# Altium PCB PCB1.PcbDoc (part 1 of 4)
Units mm, origin at the board's own origin, x right, y up, seen from the top; angles counter-clockwise.
Board outline 152.65 x 113.28 mm, 2 copper layers (Top Layer, Bottom Layer); 145 components, 136 nets, 617 pads, 371 vias.
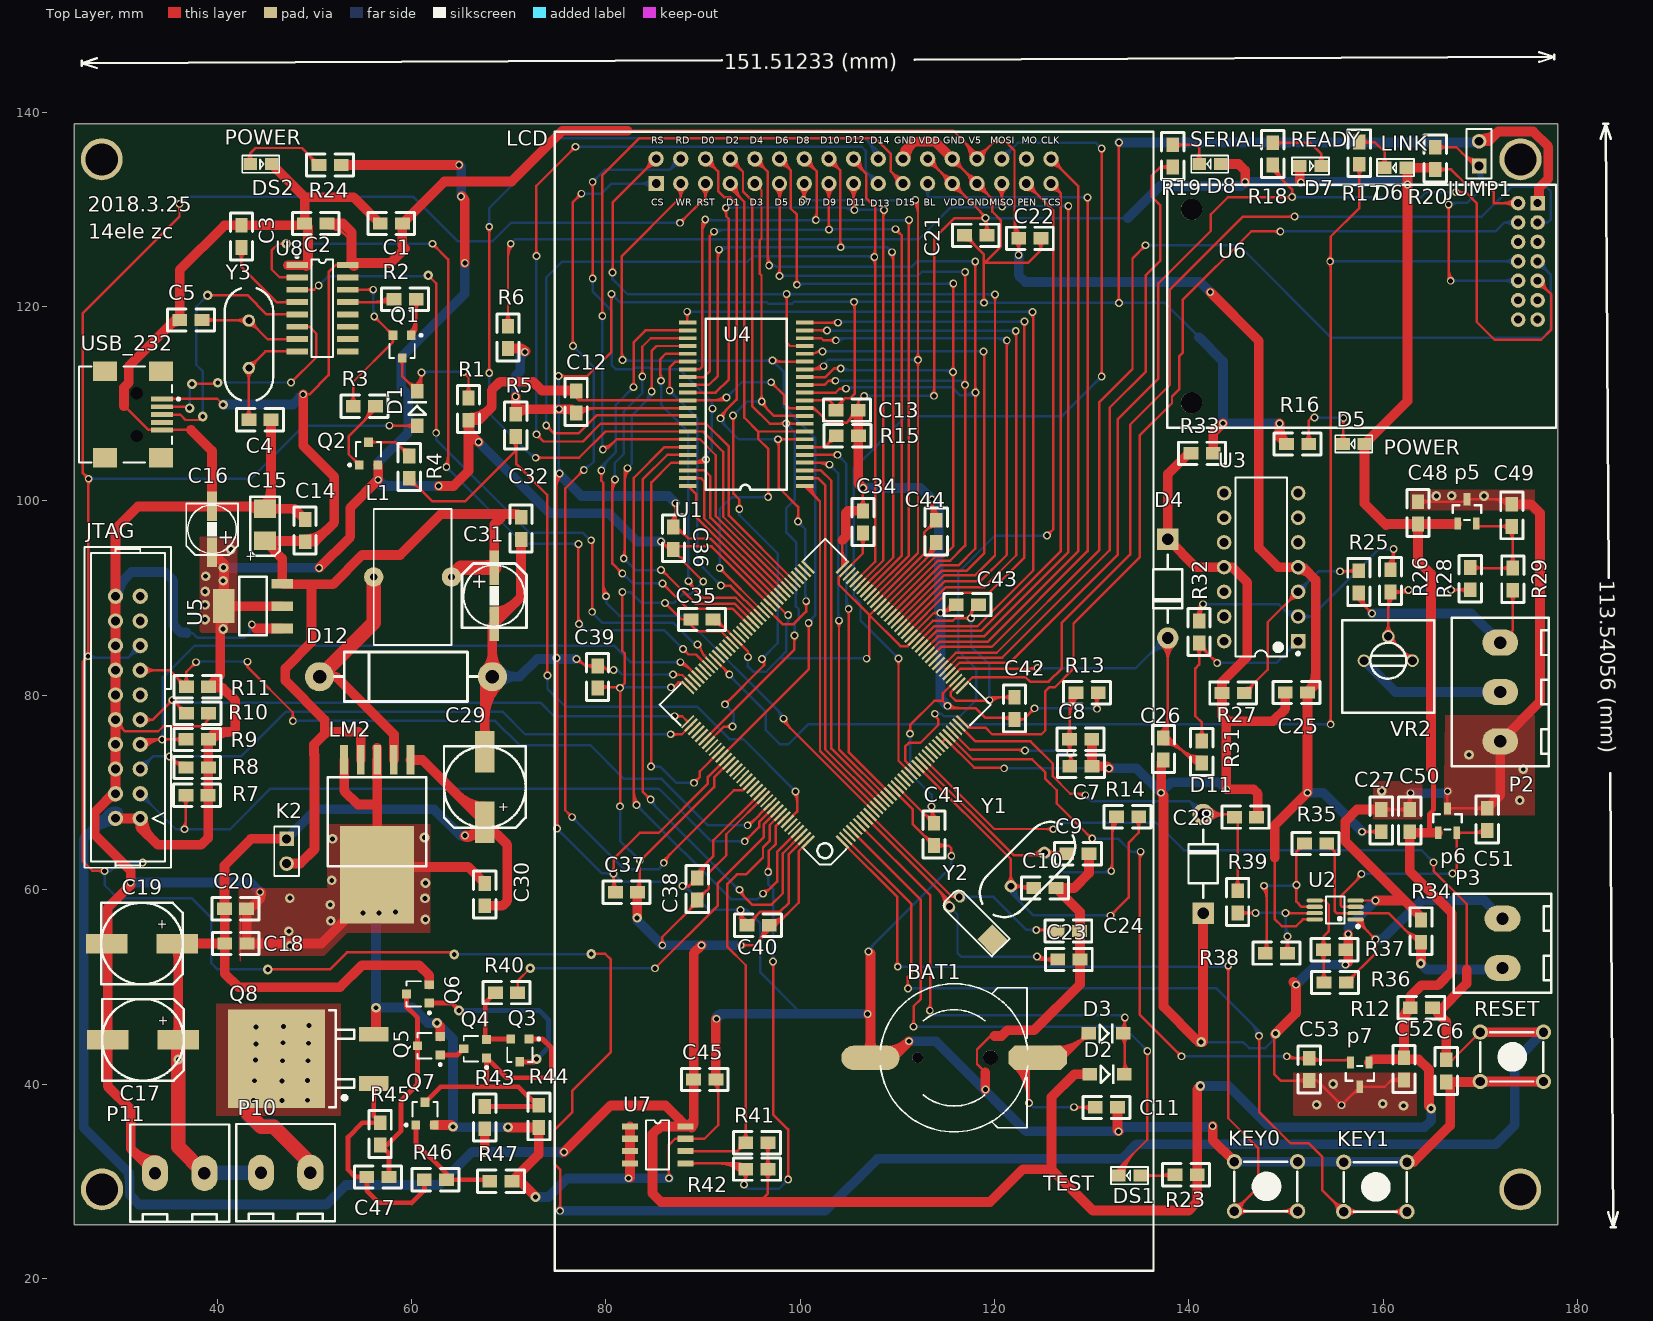
[diagram p0: Top Layer view]
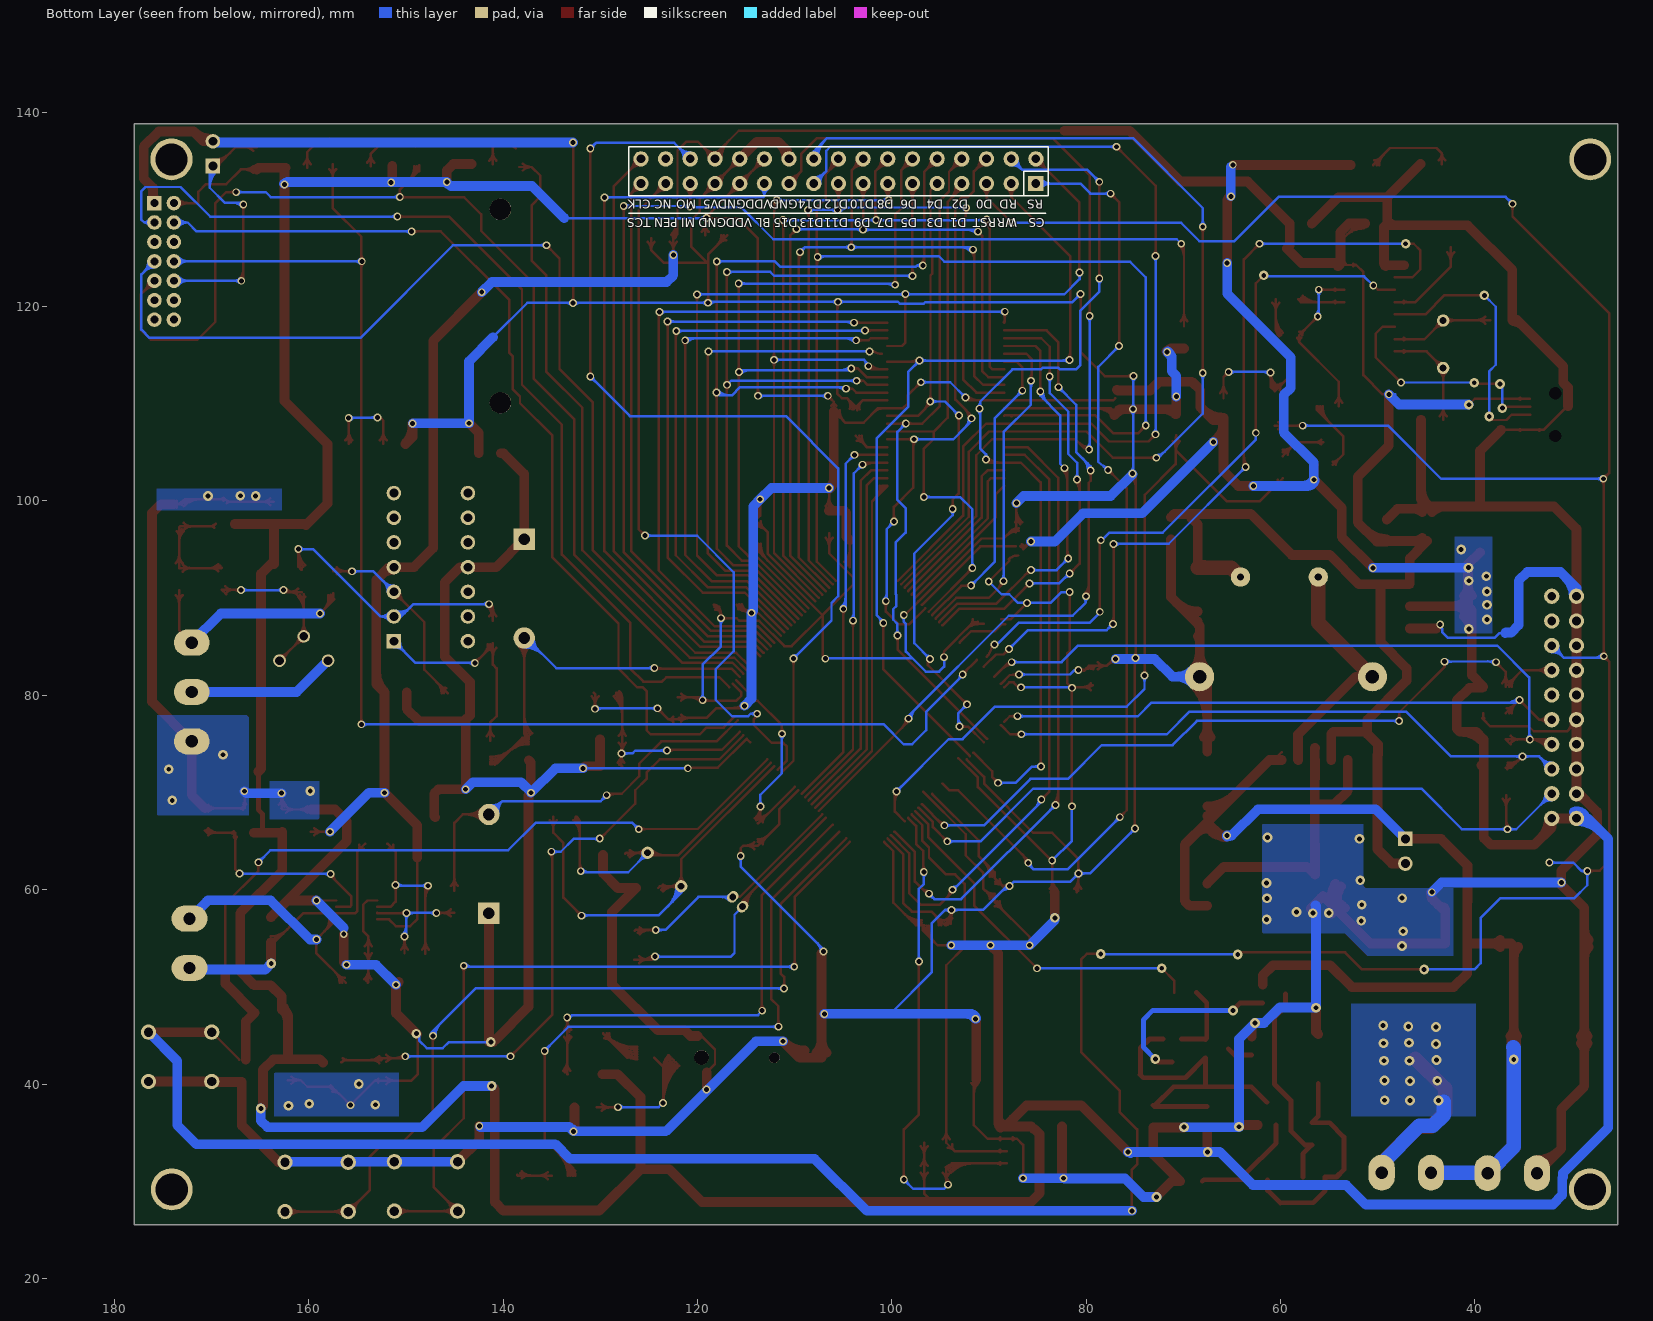
[diagram p1: Bottom Layer view, seen from below]

## Layer stack, top to bottom
Top Layer: signal copper 0.0356
Dielectric: dielectric 0.32, FR-4, Dk 4.8
Bottom Layer: signal copper 0.0356

## Board outline
25.273,138.811 177.927,138.811 177.927,25.527 25.273,25.527

## Design rules (kind name [scope] priority, off if disabled: settings)
Clearance [All] p1: gap=0.14
ComponentClearance [All] p1 off: gap=0.254 collisioncheckmode=3 verticalgap=0.254 showdistances=FALSE
HoleSize [All] p1: absolutevalues=TRUE maxlimit=2.54 minlimit=0.5 maxpercent=80.000 minpercent=20.000
HoleToHoleClearance [All] p1: gap=0.14 allowstackedmicrovias=TRUE
MinimumSolderMaskSliver [All] p1: minsoldermaskwidth=0.14
PlaneConnect [All] p1: planeconnectstyle=Direct reliefexpansion=0.508 reliefentries=4 reliefconductorwidth=0.254 reliefairgap=0.254
PolygonConnect [All] p1: connectstyle=Direct reliefconductorwidth=0.254 reliefentries=4 polygonreliefangle="90 Angle"
RoutingVias [All] p1: holewidth=0.711 width=1.27 viastyle="Through Hole" minholewidth=0.5 minwidth=1 maxholewidth=0.711 maxwidth=1.27
SilkToSilkClearance [All] p1: silktosilkclearance=0
SilkscreenOverComponentPads [All] p1: minsilkscreentomaskgap=0
SolderMaskExpansion [All] p1: expansion=0.102
Width [All] p1: maxlimit=1.5 minlimit=0.254 preferedwidth=0.254
21 further rules are at their usual default settings.

## Components (designator, comment, footprint, x,y, rotation, side; value= is the part's Value field where it differs from the comment)
BAT1 "BATT" BATM 115.824,42.697 r90 top
C1 "104" 0805 56.769,128.549 r0 top
C2 "10uf" 0805 48.997,128.549 r0 top
C3 "104" 0805 42.494,126.086 r90 top
C4 "22" 0805 45.542,108.356 r180 top
C5 "22" 0805 36.144,118.618 r0 top
C6 "104" 0805 166.472,42.494 r270 top
C7 "10uf" 0805 130.023,72.695 r180 top
C8 "104" 0805 127.711,75.489 r0 top
C9 "22" 0805 129.718,63.703 r180 top
C10 "22" 0805 126.314,60.173 r180 top
C11 "104" 0805 132.639,37.592 r180 top
C12 "104" 0805 76.937,109.042 r90 top
C13 "104" 0805 103.683,109.347 r0 top
C14 "104" 0805 49.047,98.095 r270 top
C15 "10uF" CASE-3216A 44.907,97.409 r90 top
C16 "22uF" "RVT 22UF 25V" 39.472,97.13 r180 top
C17 "100uF" CC8*10.5 32.36,44.552 r270 top
C18 "104" 0805 43.053,54.456 r180 top
C19 "100uF" CC8*10.5 32.258,54.458 r270 top
C20 "104" 0805 43.028,58.037 r180 top
C21 "104" 0805 119.202,127.33 r180 top
C22 "104" 0805 122.479,127.025 r0 top
C23 "104" 0805 128.778,52.807 r180 top
C24 "104" 0805 128.727,55.753 r180 top
C25 "104" 0805 152.197,80.289 r180 top
C26 "104" 0805 137.363,73.33 r90 top
C27 "104" 0805 159.791,65.964 r90 top
C28 "104" 0805 146.964,67.462 r180 top
C29 "100uF" CC8*10.5 67.539,70.561 r180 top
C30 "104" 0805 67.539,58.344 r90 top
C31 "100uF" "rvt 100uf /25V" 68.504,90.195 r270 top
C32 "104" 0805 71.272,98.323 r270 top
C34 "104" 0805 106.451,96.698 r90 top
C35 "104" 0805 91.034,87.808 r180 top
C36 "104" 0805 86.944,97.307 r270 top
C37 "104" 0805 80.975,59.741 r0 top
C38 "104" 0805 89.408,61.214 r270 top
C39 "104" 0805 79.146,83.033 r270 top
C40 "104" 0805 94.513,56.337 r0 top
C41 "104" 0805 113.767,64.541 r90 top
C42 "104" 0805 122.047,79.807 r270 top
C43 "104" 0805 118.339,89.332 r180 top
C44 "104" 0805 113.995,95.733 r90 top
C45 "Cap" 0805 91.313,40.462 r180 top
C47 "104" 0805 57.683,30.429 r180 top
C48 "104" 0805 163.576,99.924 r270 top
C49 "104" 0805 173.228,99.67 r270 top
C50 "104" 0805 162.712,68.25 r270 top
C51 "104" 0805 170.688,68.377 r270 top
C52 "104" 0805 162.128,40.411 r90 top
C53 "104" 0805 152.375,40.361 r90 top
D1 "1N4148" DIODE_SOP 60.579,107.747 r90 top
D2 "1N4148" DIODE_SOP 129.794,40.996 r0 top
D3 "1N4148" DIODE_SOP 129.692,45.212 r0 top
D4 "1N4733" LC-DO-41 137.82,90.983 r90 top
D5 "POWER" SMDLED 158.064,105.867 r180 top
D6 "LINK" SMDLED 162.357,134.29 r180 top
D7 "READY" SMDLED 151.409,134.468 r0 top
D8 "SERIAL" SMDLED 143.256,134.671 r180 top
D11 "1N4733" LC-DO-41 141.453,62.662 r270 top
D12 "1N5822" 1n5822 59.538,81.94 r0 top
DS1 "LED1" SMDLED 134.976,30.582 r180 top
DS2 "LED1" SMDLED 43.383,134.671 r0 top
JTAG "JTAG" JTAG_20 30.81,78.765 r90 top
JUMP1 "Jumper" HDR1X2 169.85,134.468 r90 top
K2 "Header 2" HDR1X2 47.142,65.227 r270 top
KEY0 "KEY_M" KEY_M 144.678,32.004 r0 top
KEY1 "KEY_M" KEY_M 155.931,31.953 r0 top
L1 "33uH" 100UH 56.109,92.177 r0 top
LCD "TFT4.3" DB2*17-3.5 78.181,137.998 r0 top locked
LM2 "LM2596S-5.0" LM2596S-5.0 55.474,68.453 r270 top
P2 "PT100 TL" 3SPI 172.034,75.26 r90 top
P3 "PT100" 2SPI 176.327,19.812 r90 top
p5 "ref2930" LC-SOT-23(SOT-23-3) 168.605,98.933 r270 top
p6 "ref2930" LC-SOT-23(SOT-23-3) 166.599,67.107 r270 top
p7 "ref2930" LC-SOT-23(SOT-23-3) 157.582,40.97 r90 top
P10 "Header 2" 2SPI 12.37,26.822 r0 top
P11 "Header 2" 2SPI 1.473,26.772 r0 top
Q1 "S8050" SOT-23R 59.03,116.002 r180 top
Q2 "S8550" SOT-23R 55.575,104.75 r0 top
Q3 "2N5551" SOT-23R 71.145,43.586 r180 top
Q4 "2N5401" SOT-23R 66.675,43.637 r90 top
Q5 "2N5551" SOT-23R 61.9,43.942 r90 top
Q6 "2N5401" SOT-23R 60.782,49.276 r90 top
Q7 "2N5551" SOT-23R 61.392,36.83 r0 top
Q8 "NMOS-2" LC-TO-263-2 56.109,42.596 r0 top
R1 "10K" 0805 65.862,110.592 r270 top
R2 "1K" 0805 60.477,120.752 r180 top
R3 "1K" 0805 56.286,109.753 r180 top
R4 "1K" 0805 59.766,102.337 r90 top
R5 "10K" 0805 70.714,106.629 r90 top
R6 "10K" 0805 69.926,117.983 r270 top
R7 "10K" 0805 39.065,69.723 r180 top
R8 "10K" 0805 39.091,72.568 r180 top
R9 "10K" 0805 39.091,75.463 r180 top
R10 "10K" 0805 39.116,78.156 r180 top
R11 "10K" 0805 39.116,80.874 r180 top
R12 "10K" 0805 165.049,47.854 r180 top
R13 "10R" 0805 128.372,80.264 r0 top
R14 "1M" 0805 132.537,67.513 r0 top
R15 "10K" 0805 103.708,106.705 r0 top
R16 "2K" 0805 152.324,105.867 r180 top
R17 "1K" 0805 157.531,136.931 r270 top
R18 "1K" 0805 148.615,136.855 r270 top
R19 "1K" 0805 138.328,136.652 r270 top
R20 "10K" 0805 165.354,136.398 r270 top
R23 "510" 0805 138.557,30.658 r0 top
R24 "510" 0805 50.47,134.569 r0 top
R25 "1K" 0805 157.48,90.526 r90 top
R26 "1K" 0805 160.731,90.627 r90 top
R27 "20K" 0805 143.408,80.239 r0 top
R28 "2K" 0805 168.935,90.856 r90 top
R29 "2K" 0805 173.33,90.805 r90 top
R31 "Res2" 0805 141.326,75.311 r270 top
R32 "20K" 0805 141.046,87.655 r270 top
R33 "0Ω" 0805 140.208,104.902 r0 top
R34 "3.3K" 0805 163.881,54.585 r90 top
R35 "47K" 0805 154.178,64.745 r180 top
R36 "47K" 0805 153.899,50.444 r0 top
R37 "470K" 0805 156.134,53.823 r180 top
R38 "470K" 0805 150.139,53.467 r180 top
R39 "1K" 0805 145.009,59.893 r270 top
R40 "1K" 0805 70.917,49.403 r180 top
R41 "4.7K" 0805 94.386,33.96 r0 top
R42 "4.7K" 0805 94.386,31.242 r0 top
R43 "10K" 0805 67.539,37.694 r270 top
R44 "10K" 0805 73.101,35.535 r90 top
R45 "10" 0805 56.769,36.017 r270 top
R46 "10K" 0805 63.602,30.15 r180 top
R47 "10K" 0805 70.333,29.997 r180 top
RESET "KEY_M" KEY_M 169.977,45.339 r0 top
U1 "STM32F103ZET6" LQFP144 104.324,64.916 r135 top
U2 "LM358" LC-MSOP-8 155.042,57.912 r90 top
U3 "LM324" LC-DIP-14 147.422,93.193 r180 top
U4 "IS62WV51216" TSOP44 100.432,101.549 r180 top
U5 "AMS1117M3" LC-SOT-223 43.688,89.179 r0 top
U6 "WIFI" USR-WIFI232 156.693,115.418 r90 top
U7 "24C02" SOP-8 82.474,35.636 r0 top
U8 "CH340G" SOP16M 50.825,119.837 r270 top
USB_232 "USB" USB/SM0.8-6H5 26.467,108.89 r180 top
VR2 "502" 503 160.503,83.566 r0 top
Y1 "8MHz" XTAL_US 121.666,60.35 r45 top
Y2 "32.768MHz" XTAL32 116.357,59.258 r315 top
Y3 "12MHz" XTAL_US 43.256,118.567 r270 top

## Footprints (in the part's own frame and the unit in brackets; to place one, negate y for a bottom-side part, rotate by r counter-clockwise, add the part's x,y. Pads: shape width x height; smd on the part's side, far side on the other; paste and mask are expansions set on the pad)
1n5822 [mm]
  round 3 hole 1.4: A(8.775,-0.025) K(-9.005,-0.025)
  silkscreen extent -7.48,-2.57 7.25,2.52
2SPI [mil]
  oval 106x145 hole 50: 1(1265,160) 2(1465,160)
  silkscreen extent 1165,-37 1565,357
3SPI [mil]
  oval 106x145 hole 50: 1(0,0) 2(200,0) 3(400,0)
  silkscreen extent -100,-197 500,197
100UH [mm]
  round 2 hole 0.7: 1(8,0)
  round 2 hole 0.762: 2(0,0)
  silkscreen extent 0,-7 8,7
503 [mm]
  round 1.3 hole 0.9: 1(-2.5,0) 2(2.5,0) 3(0,2.5)
  silkscreen extent -4.75,-5.35 4.75,4.15, body extent -4.62,-5.21 4.62,4.04, height 11.05
0805 [mil]
  rect 60x50 smd: 1(0,-0.06) 2(90,-0.06)
  silkscreen extent -50,-45 140,45
BATM [mm]
  round 1.1 hole 1.1 unplated: 0(0,3.748)
  round 1.5 hole 1.5 unplated: 0(0.025,-3.752)
  oct 2.5x6 smd: 1(0,-8.602)
  oval 2.5x6 smd: 2(0,8.598)
  silkscreen extent -7.62,-7.58 7.62,7.57
CASE-3216A [mil]
  rect 75x90 smd: A(-60,0) K(70,0)
  silkscreen extent -120,-60 120,60
CC8*10.5 [mm]
  rect 2x4.3 smd: A(0,3.627) K(0,-3.627)
  silkscreen extent -4.2,-4.2 4.2,4.2, body extent -4.22,-4.11 4.15,4.27, height 10.5
DB2*17-3.5 [mil]
  rect 62x62 hole 35: 1(275,-210)
  round 62 hole 35: 2(275,-110) 3(375,-210) 4(375,-110) 5(475,-210) 6(475,-110) 7(575,-210) 8(575,-110) 9(675,-210) 10(675,-110) 11(775,-210) 12(775,-110) 13(875,-210) 14(875,-110) 15(975,-210) 16(975,-110) 17(1075,-210) 18(1075,-110) 19(1175,-210) 20(1175,-110) 21(1275,-210) 22(1275,-110) 23(1375,-210) 24(1375,-110) 25(1475,-210) 26(1475,-110) 27(1575,-210) 28(1575,-110) 29(1675,-210) 30(1675,-110) 31(1775,-210) 32(1775,-110) 33(1875,-210) 34(1875,-110)
  silkscreen extent -135,-4615 2290,0
DIODE_SOP [mm]
  rect 1.5x1.3 smd: 1(0,0) 2(3.556,0)
  silkscreen extent 1.14,-1.02 2.56,1.02
HDR1X2 [mm]
  rect 1.5x1.5 hole 0.9: 1(0,0)
  round 1.5 hole 0.9: 2(2.54,0)
  silkscreen extent -1.27,-1.27 3.81,1.27
JTAG_20 [mil]
  round 62 hole 35: 1(-450,-50) 2(-450,50) 3(-350,-50) 4(-350,50) 5(-250,-50) 6(-250,50) 7(-150,-50) 8(-150,50) 9(-50,-50) 10(-50,50) 11(50,-50) 12(50,50) 13(150,-50) 14(150,50) 15(250,-50) 16(250,50) 17(350,-50) 18(350,50) 19(450,-50) 20(450,50)
  silkscreen extent -650,-175 650,175
KEY_M [mil]
  round 62 hole 38: 1(0,0) 1(255.91,0) 2(0,-200) 2(255.91,-200)
  silkscreen extent 0,-200 255,0
LC-DIP-14 [mm]
  rect 1.5x1.5 hole 0.9: 1(-3.81,7.62)
  round 1.5 hole 0.9: 2(-3.81,5.08) 3(-3.81,2.54) 4(-3.81,0) 5(-3.81,-2.54) 6(-3.81,-5.08) 7(-3.81,-7.62) 8(3.81,-7.62) 9(3.81,-5.08) 10(3.81,-2.54) 11(3.81,0) 12(3.81,2.54) 13(3.81,5.08) 14(3.81,7.62)
  silkscreen extent -3.95,-9.2 2.65,9.2
LC-DO-41 [mm]
  rect 2.2x2.2 hole 1.2: A(5.08,0)
  round 2.2 hole 1.2: K(-5.08,0)
  silkscreen extent -3.5,-1.5 3.5,1.5, body extent -5.51,-1.35 5.51,1.35, height 3.35
LC-MSOP-8 [mm]
  oval 0.43x1.7 smd mask+0.051: 1(-0.975,-2.1) 2(-0.325,-2.1) 3(0.325,-2.1) 4(0.975,-2.1) 5(0.975,2.1) 6(0.325,2.1) 7(-0.325,2.1) 8(-0.975,2.1)
  silkscreen extent -1.85,-2.5 1.38,0.95
LC-SOT-23(SOT-23-3) [mm]
  rect 1.25x0.7 smd: 1(1.25,-0.95) 2(1.25,0.95) 3(-1.25,0)
  silkscreen extent -0.65,-1.46 0.9,1.46, body extent -1.5,-1.5 1.5,1.5, height 1.3
LC-SOT-223 [mm]
  rect 2.2x1 smd: 1(3,-2.3) 2(3,0) 3(3,2.3)
  rect 2.2x3.5 smd: 2(-3,0)
  silkscreen extent -1.4,-3 1.4,3, body extent -3.49,-3.24 3.49,3.24, height 1.64
LC-TO-263-2 [mm]
  rect 3x1.5 smd: 1(0,-2.54) 3(0,2.54)
  rect 10x10.1 smd: 2(-10,0)
  silkscreen extent -4.6,-5 -2,5
LM2596S-5.0 [mil]
  rect 120x32 smd: 1(-192.91,173.23) 2(-192.91,106.23) 3(-192.91,39.23) 4(-192.91,-27.77) 5(-192.91,-94.77)
  rect 393.7x300 smd: 3(272.09,38.23)
  silkscreen extent -123,-162 237,238
LQFP144 [mm]
  rect 1.8x0.254 smd: 1(-0.009,0.001) 2(-0.009,-0.499) 3(-0.009,-0.999) 4(-0.009,-1.499) 5(-0.009,-1.999) 6(-0.009,-2.499) 7(-0.009,-2.999) 8(-0.009,-3.499) 9(-0.009,-3.999) 10(-0.009,-4.499) 11(-0.009,-4.999) 12(-0.009,-5.499) 13(-0.009,-5.999) 14(-0.009,-6.499) 15(-0.009,-6.999) 16(-0.009,-7.499) 17(-0.009,-7.999) 18(-0.009,-8.499) 19(-0.009,-8.999) 20(-0.009,-9.499) 21(-0.009,-9.999) 22(-0.009,-10.499) 23(-0.009,-10.999) 24(-0.009,-11.499) 25(-0.009,-11.999) 26(-0.009,-12.499) 27(-0.009,-12.999) 28(-0.009,-13.499) 29(-0.009,-13.999) 30(-0.009,-14.499) 31(-0.009,-14.999) 32(-0.009,-15.499) 33(-0.009,-15.999) 34(-0.009,-16.499) 35(-0.009,-16.999) 36(-0.009,-17.499) 73(22.491,-17.499) 74(22.491,-16.999) 75(22.491,-16.499) 76(22.491,-15.999) 77(22.491,-15.499) 78(22.491,-14.999) 79(22.491,-14.499) 80(22.491,-13.999) 81(22.491,-13.499) 82(22.491,-12.999) 83(22.491,-12.499) 84(22.491,-11.999) 85(22.491,-11.499) 86(22.491,-10.999) 87(22.491,-10.499) 88(22.491,-9.999) 89(22.491,-9.499) 90(22.491,-8.999) 91(22.491,-8.499) 92(22.491,-7.999) 93(22.491,-7.499) 94(22.491,-6.999) 95(22.491,-6.499) 96(22.491,-5.999) 97(22.491,-5.499) 98(22.491,-4.999) 99(22.491,-4.499) 100(22.491,-3.999) 101(22.491,-3.499) 102(22.491,-2.999) 103(22.491,-2.499) 104(22.491,-1.999) 105(22.491,-1.499) 106(22.491,-0.999) 107(22.491,-0.499) 108(22.491,0.001)
  rect 0.254x1.8 smd: 37(2.491,-19.999) 38(2.991,-19.999) 39(3.491,-19.999) 40(3.991,-19.999) 41(4.491,-19.999) 42(4.991,-19.999) 43(5.491,-19.999) 44(5.991,-19.999) 45(6.491,-19.999) 46(6.991,-19.999) 47(7.491,-19.999) 48(7.991,-19.999) 49(8.491,-19.999) 50(8.991,-19.999) 51(9.491,-19.999) 52(9.991,-19.999) 53(10.491,-19.999) 54(10.991,-19.999) 55(11.491,-19.999) 56(11.991,-19.999) 57(12.491,-19.999) 58(12.991,-19.999) 59(13.491,-19.999) 60(13.991,-19.999) 61(14.491,-19.999) 62(14.991,-19.999) 63(15.491,-19.999) 64(15.991,-19.999) 65(16.491,-19.999) 66(16.991,-19.999) 67(17.491,-19.999) 68(17.991,-19.999) 69(18.491,-19.999) 70(18.991,-19.999) 71(19.491,-19.999) 72(19.991,-19.999) 109(19.991,2.501) 110(19.491,2.501) 111(18.991,2.501) 112(18.491,2.501) 113(17.991,2.501) 114(17.491,2.501) 115(16.991,2.501) 116(16.491,2.501) 117(15.991,2.501) 118(15.491,2.501) 119(14.991,2.501) 120(14.491,2.501) 121(13.991,2.501) 122(13.491,2.501) 123(12.991,2.501) 124(12.491,2.501) 125(11.991,2.501) 126(11.491,2.501) 127(10.991,2.501) 128(10.491,2.501) 129(9.991,2.501) 130(9.491,2.501) 131(8.991,2.501) 132(8.491,2.501) 133(7.991,2.501) 134(7.491,2.501) 135(6.991,2.501) 136(6.491,2.501) 137(5.991,2.501) 138(5.491,2.501) 139(4.991,2.501) 140(4.491,2.501) 141(3.991,2.501) 142(3.491,2.501) 143(2.991,2.501) 144(2.491,2.501)
  silkscreen extent -0.81,-20.8 23.29,3.3
"RVT 22UF 25V" [mil]
  rect 40x120 smd: A(0,95) K(0,-91)
  silkscreen extent -104,-103 105,106, body extent -104,-110 105,110, height 205
"rvt 100uf /25V" [mil]
  rect 140x40 smd: A(-116,0) K(112,0)
  silkscreen extent -132,-130 128,130, body extent -143,-130 133,130, height 205
SMDLED [mm]
  rect 1.4x1.27 smd: A(0.001,-0.002) K(2.211,-0.002)
  silkscreen extent -0.8,-0.89 3.01,0.89
SOP16M [mm]
  rect 0.6x2.2 smd: 1(-4.445,-2.6) 2(-3.175,-2.6) 3(-1.905,-2.6) 4(-0.635,-2.6) 5(0.635,-2.6) 6(1.905,-2.6) 7(3.175,-2.6) 8(4.445,-2.6) 9(4.445,2.6) 10(3.175,2.6) 11(1.905,2.6) 12(0.635,2.6) 13(-0.635,2.6) 14(-1.905,2.6) 15(-3.175,2.6) 16(-4.445,2.6)
  silkscreen extent -5.42,-2.72 5,1.1
SOP-8 [mil]
  rect 65x25 smd: 1(0,0) 2(0,-50) 3(0,-100) 4(0,-150) 5(224.41,-150) 6(224.41,-100) 7(224.41,-50) 8(224.41,0)
  silkscreen extent 65,-175 159,25
SOT-23R [mm]
  rect 0.9x0.95 smd: 1(0.95,-1.048) 2(-0.95,-1.048) 3(0,1.302)
  silkscreen extent -2.07,-1.17 1.3,1.3
TSOP44 [mm]
  rect 1.8x0.4 smd: 1(-0.009,0.001) 2(-0.009,-0.799) 3(-0.009,-1.599) 4(-0.009,-2.399) 5(-0.009,-3.199) 6(-0.009,-3.999) 7(-0.009,-4.799) 8(-0.009,-5.599) 9(-0.009,-6.399) 10(-0.009,-7.199) 11(-0.009,-7.999) 12(-0.009,-8.799) 13(-0.009,-9.599) 14(-0.009,-10.399) 15(-0.009,-11.199) 16(-0.009,-11.999) 17(-0.009,-12.799) 18(-0.009,-13.599) 19(-0.009,-14.399) 20(-0.009,-15.199) 21(-0.009,-15.999) 22(-0.009,-16.799) 23(11.991,-16.799) 24(11.991,-15.999) 25(11.991,-15.199) 26(11.991,-14.399) 27(11.991,-13.599) 28(11.991,-12.799) 29(11.991,-11.999) 30(11.991,-11.199) 31(11.991,-10.399) 32(11.991,-9.599) 33(11.991,-8.799) 34(11.991,-7.999) 35(11.991,-7.199) 36(11.991,-6.399) 37(11.991,-5.599) 38(11.991,-4.799) 39(11.991,-3.999) 40(11.991,-3.199) 41(11.991,-2.399) 42(11.991,-1.599) 43(11.991,-0.799) 44(11.991,0.001)
  silkscreen extent 1.83,-17.2 10.16,0.4
USB/SM0.8-6H5 [mm]
  rect 2.3x0.5 smd: 1(-7.85,-1.6) 2(-7.85,-0.8) 3(-7.85,0) 4(-7.85,0.8) 5(-7.85,1.6)
  rect 2.5x2 smd: 6(-7.75,4.45) 7(-1.996,4.45) 8(-7.75,-4.45) 9(-1.996,-4.45)
  round 0.6 hole 1.27 unplated: MH1(-5.25,2.2) MH2(-5.25,-2.2)
  silkscreen extent -9.68,-4.95 0.7,4.95
USR-WIFI232 [mm]
  round 2.21 hole 2.21: 0(-5.31,16.423) 0(14.59,16.423)
  rect 1.5x1.5 hole 0.813: 1(15.24,-19.177)
  round 1.5 hole 0.813: 2(15.24,-17.177) 3(13.24,-19.177) 4(13.24,-17.177) 5(11.24,-19.177) 6(11.24,-17.177) 7(9.24,-19.177) 8(9.24,-17.177) 9(7.24,-19.177) 10(7.24,-17.177) 11(5.24,-19.177) 12(5.24,-17.177) 13(3.24,-19.177) 14(3.24,-17.177)
  silkscreen extent -7.86,-21.08 17.14,18.92
XTAL32 [mil]
  oval 50x40 hole 28: 1(0,0) 2(0,-56)
  rect 92.13x86 smd: ""(220,-27)
  silkscreen extent -28,-77 264,25
XTAL_US [mil]
  round 50 hole 28: 1(0,0) 2(192.13,0)
  silkscreen extent -131,-98 323,98

## Part data
BAT1: library part BAT
C1 C2 C3 C4 C5 C6 C7 C8 C9 C10 C11 C12 C13 C21 C22 C23 C24 C25 C26 C27 C28 C34 C35 C36 C37 C38 C39 C40 C41 C42 C43 C44 C47 C48 C49 C50 C51 C52 C53: library part C
C14 C18 C20: library part Cap1
C15 C16: library part Cap2
C17 C19 C29 C31: library part Cap3
C30 C32: library part CAP
C45: "Capacitor"
D1 D2 D3: library part D
D4 D11: library part "Diode 18TQ045", "Schottky Rectifier"
D5 D6 D7 D8: library part LED1
D12: library part ZENER3, "Zener Diode"
DS1 DS2: library part LED2, "Typical RED, GREEN, YELLOW, AMBER GaAs LED"
K2 P10 P11: "Header, 2-Pin"
L1: library part L
LCD: library part TFT_LCD2
LM2: library part 12V-5V
P2: library part "Header 3", "Header, 3-Pin"
P3: library part "Header 2", "Header, 2-Pin"
Q1 Q3 Q5 Q7: library part NPN, "8050/BCW846/BCW847"
Q2 Q4 Q6: library part PNP, "8550/BCW68"
Q8: "N-Channel Power MOSFET"
R1 R2 R3 R4 R5 R6 R7 R8 R9 R10 R11 R12 R13 R14 R15 R23 R24 R25 R26 R27 R28 R29 R32 R33 R34 R35 R36 R37 R38 R39 R40 R41 R42 R43 R44 R45 R46 R47: library part R
R16 R17 R18 R19 R20: library part Res1
R31: "Resistor"
U4: library part IS61LV51216
U5: library part AMS1117-3.3
U6: library part USR-WIFI232-ABD
U7: library part 24C256
U8: "USB2UART"
USB_232: library part USB5
VR2: library part RPot, "Potentiometer"
Y1 Y2 Y3: library part XTAL, "Crystal Oscillator"

## Free pads (board coordinates)
  round 4.318 hole 3.302: 0(28.143,29.159) 1(28.118,135.159) 2(174.118,135.159) 3(174.092,29.159)

## Via types
v1: diameter 0.8, hole 0.508, Top Layer to Bottom Layer, 296 vias
v2: diameter 1, hole 0.5, Top Layer to Bottom Layer, 75 vias

## Nets (pads, with @x,y where several pads share a name; then routed paths per layer and width w, separated by ;. In a path a pad name is that pad's centre, name@x,y a point inside that pad or via, vN(x,y) a via of type N, cw(c..) or ccw(c..) an arc to the next point about the centre after c; other vN are vias at no path point)
24V: C17.A C18.2 C19.A C20.2 C29.A C30.1 K2.1 LM2.1 P10.1 P11.2 Q6.1 | length 153.7
  Top Layer w0.254: C17.A@35.885,44.653 C17.A@35.987,44.552 ; LM2.1@59.874,74.14 LM2.1@60.267,73.747
  Top Layer w1: C19.A@35.531,54.104 cw(c34.433,53.005) 35.987,53.005 ; C17.A@35.633,44.905 ccw(c34.78,45.759) 35.987,45.759 ccw(c37.194,45.759) C17.A@36.34,44.905 ; C17.A@35.987,44.552 35.987,54.173 36.271,54.458 C18.2@40.767,54.458 ; C19.A@37.389,54.104 cw(c38.242,53.25) 38.242,54.458 cw(c38.242,55.665) C19.A@37.389,54.811 ; K2.1@47.142,65.227 43.485,65.227 40.742,62.484 40.742,58.75 40.767,58.725 C18.2@40.767,54.458 ; LM2.1@59.874,73.353 61.12,73.353 C29.A@67.539,66.934 ; Q6.1@61.83,50.226 61.83,51.174 60.782,52.222 54.889,52.222 52.629,49.962 42.189,49.962 40.767,51.384 C18.2@40.767,54.458 ; 64.722,69.751 ccw(c67.539,72.568) C29.A@67.539,68.584 ; v1@65.454,65.498 ccw(c65.767,66.003) 66.187,65.583 ; v1@65.507,65.483 ccw(c65.507,66.885) 66.498,65.893 ; v1(65.507,65.583) 66.187,65.583 ; v1@65.845,65.583 ccw(c65.845,67.477) C29.A@67.185,66.138 ; 66.429,68.044 ccw(c67.539,69.153) C29.A@67.539,67.584 ; C29.A@67.13,66.072 cw(c66.187,66.735) 66.187,65.583 ; C29.A@67.539,66.284 cw(c67.539,64.715) 68.648,65.825 ; C30.1@67.54,58.344 69.342,58.344 69.85,58.852 69.85,64.623 C29.A@67.539,66.934 ; 66.187,65.583 C29.A@67.539,66.934
  Top Layer w1.5: C17.A@35.987,44.552 35.987,33.533 P11.2@38.684,30.836 ; P10.1@44.45,30.836 P10.1@44.501,30.886
  Bottom Layer w1: K2.1@47.142,65.227 50.19,68.275 62.332,68.275 65.024,65.583 v1(65.507,65.583) ; 64.853,65.753 ccw(c65.507,66.406) v1@65.507,65.483
  Bottom Layer w1.5: 36.043,43.79 35.992,43.739 35.992,33.528 P11.2@38.684,30.836 38.735,30.886 P10.1@44.501,30.886
  other v2: 35.992,42.52
AGND: C7.1 C8.2 C25.2 C26.1 C27.2 C28.1 C48.1 C49.1 C50.1 C51.1 C52.1 C53.1 D4.A D11.A P2.1 p5.3 p6.3 p7.3 R27.1 R33.1 R34.2 R37.1 U1.30 U1.31 U2.4 U3.11 | length 304.8
  Top Layer w0.254: U1.30@114.577,75.169 114.93,75.522 117.91,72.542 v1@120.98,72.542 ; C8.2@129.638,75.128 cw(c128.709,74.199) 130.023,74.199 ; C8.2@129.818,75.308 cw(c129.323,74.813) 130.023,74.813 ; 130.023,74.322 cw(c131.162,74.322) C8.2@130.356,75.128 ; v2@148.838,45.13 148.615,44.907 148.768,44.755 148.768,41.021 149.428,40.361 C53.1@152.376,40.361 153.162,40.361 ; C53.1@152.017,40.001 ccw(c151.15,39.134) 151.15,40.361 ccw(c151.15,41.587) C53.1@152.017,40.72 ; C53.1@152.839,40.152 cw(c153.162,40.007) 153.162,40.361 ; C53.1@152.839,40.569 ccw(c153.162,40.714) 153.162,40.361 ; v1@155.429,37.821 ccw(c154.77,37.821) 155.236,38.287 ccw(c155.702,38.753) 155.702,38.094 ccw(c155.702,38.704) 156.134,38.272 ; v1(155.702,37.821) v1@155.692,37.831 ; v1@155.975,37.821 cw(c156.682,37.821) 156.182,38.321 ; 156.731,38.87 cw(c157.582,38.02) p7.3@157.582,39.222 ; U2.4@157.142,58.887 v1(159.207,58.887) ; 157.165,39.304 cw(c157.582,38.887) p7.3@157.582,39.476 ; p7.3@157.739,39.563 cw(c158.12,39.182) 158.12,39.72 cw(c158.12,40.259) p7.3@157.739,39.878 ; C27.2@159.434,67.891 ccw(c158.567,67.023) 158.567,68.25 ccw(c158.567,69.476) C27.2@159.434,68.609 ; C27.2@159.793,68.25 C50.1@162.711,68.25 C50.1@162.789,68.328 ; C27.2@160.152,67.891 cw(c161.019,67.023) 161.019,68.25 cw(c161.019,69.476) C27.2@160.152,68.609 ; C52.1@161.771,40.052 ccw(c160.903,39.185) 160.903,40.411 ccw(c160.903,41.638) C52.1@161.771,40.771 ; C52.1@162.13,40.411 160.833,40.411 160.142,39.72 p7.3@157.582,39.72 v1@155.692,37.831 ; C50.1@162.352,67.891 ccw(c161.484,67.023) 161.484,68.25 ccw(c161.484,69.476) C50.1@162.352,68.609 ; C50.1@162.352,68.736 ccw(c161.296,69.791) v1@162.789,69.791 ; C50.1@162.531,68.556 ccw(c161.91,69.178) 162.789,69.178 ; v1@162.596,69.733 cw(c162.13,69.267) 162.789,69.267 cw(c163.448,69.267) v1@162.982,69.733 ; 162.789,69.415 ccw(c163.749,69.415) C50.1@163.07,68.736 ; v1(162.789,69.926) C50.1@162.789,68.328 ; C50.1@162.818,68.357 C50.1@162.789,68.328 ; C48.1@163.574,99.924 168.346,99.924 p5.3@168.605,100.183 172.713,100.183 C49.1@173.226,99.67 173.863,99.67 ; C48.1@163.934,99.564 cw(c164.801,98.697) 164.801,99.924 cw(c164.801,101.15) C48.1@163.934,100.283 ; p6.3@166.441,68.789 ccw(c166.06,69.17) 166.599,69.17 ccw(c167.137,69.17) p6.3@166.756,68.789 ; v1@166.599,70.129 p6.3@166.599,68.357 166.619,68.377 C51.1@170.686,68.377 ; p6.3@166.756,68.199 cw(c167.185,67.77) 167.185,68.377 ; p6.3@166.756,68.514 ccw(c167.089,68.847) 167.089,68.377 ; 168.029,99.924 cw(c168.029,99.332) p5.3@168.448,99.75 ; 168.105,99.924 ccw(c168.105,100.409) p5.3@168.448,100.066 ; p5.3@168.763,100.025 cw(c169.144,99.645) 169.144,100.183 cw(c169.144,100.721) p5.3@168.763,100.341 ; C51.1@170.327,68.018 ccw(c169.46,67.15) 169.46,68.377 ccw(c169.46,69.603) C51.1@170.327,68.736 ; 171.067,100.183 cw(c171.067,97.637) C49.1@172.867,99.437 ; 171.68,100.183 cw(c171.68,98.251) C49.1@173.047,99.617 ; 172.294,100.183 cw(c172.294,98.864) C49.1@173.226,99.797 ; C49.1@173.586,99.31 cw(c174.453,98.443) 174.453,99.67 cw(c174.453,100.896) C49.1@173.586,100.029 ; 153.162,40.361 v1@155.692,37.831
  Top Layer w1: C8.2@129.997,75.487 130.023,75.462 C7.1@130.023,72.696 131.57,72.696 v1(131.775,72.492) ; v1(137.135,69.977) 137.135,73.1 C26.1@137.365,73.33 ; v1@137.389,69.723 137.389,47.955 140.792,44.552 ; R33.1@140.208,104.9 139.952,104.9 137.82,102.768 D4.A@137.82,96.063 140.691,93.193 U3.11@143.612,93.193 144.424,93.193 145.999,91.618 145.999,83.972 143.408,81.382 R27.1@143.408,80.237 143.408,77.927 143.84,77.495 v1(143.84,70.333) 146.634,70.333 147.091,69.875 147.091,67.591 C28.1@146.964,67.464 ; v2@140.906,44.552 140.792,44.552 ; D11.A@141.453,57.582 141.453,44.348 141.427,44.323 v2(141.249,44.323) 141.021,44.323 140.792,44.552 ; 143.993,77.343 148.641,77.343 149.911,78.613 C25.2@149.911,80.291 ; v2@148.838,45.13 151.003,47.295 v1(151.003,50.216) v1@150.722,50.497 ; v1@156.388,52.553 v1(156.388,55.423) ; v1(159.207,58.887) 161.866,58.887 ; C27.2@159.793,68.25 157.302,68.25 156.083,67.031 156.083,64.973 R34.2@163.882,57.174 ; C51.1@170.686,68.377 172.034,69.725 P2.1@172.034,75.26 176.124,79.35 176.124,98.755 175.209,99.67 173.863,99.67
  Bottom Layer w0.254: v1(120.98,72.492) v1(131.775,72.492) ; v2(141.249,44.323) 145.567,44.323 146.202,43.688 147.853,43.688 148.641,44.475 148.641,45.085 148.742,45.187 v2(148.92,45.187) ; v1(162.789,69.926) v1@162.992,70.129 ; v1@162.802,69.913 cw(c163.325,69.39) 163.325,70.129 ; v1@162.982,69.733 cw(c163.938,68.777) 163.938,70.129
  Bottom Layer w1: v1(131.775,72.492) 134.62,72.492 v1(137.135,69.977) ; v1@137.135,70.053 138.125,71.044 143.129,71.044 v1(143.84,70.333) ; v1(151.003,50.216) 153.06,52.273 v1(156.108,52.273) ; 156.388,56.068 v1(159.207,58.887) ; v1(162.789,69.926) 166.421,69.926 v1(166.624,70.129)
  other v2: 162.077,37.77 153.137,37.871 159.944,37.973 154.838,40.005 174.041,69.19 159.842,70.155 174.396,72.39 168.808,73.889 165.456,100.508 170.358,100.508 167.03,100.533
BOOT0: R4.1 R5.1 U1.138 | length 84.6
  Top Layer w0.254: R4.1@59.768,101.702 cw(c59.768,100.169) 60.852,101.253 ; R4.1@59.768,101.956 cw(c59.768,101.036) 60.418,101.686 ; R4.1@59.768,102.337 62.155,99.949 65.481,99.949 70.739,105.207 ; R4.1@60.276,102.21 ccw(c61.196,102.21) 60.545,101.559 ; R5.1@70.356,106.143 cw(c69.309,105.096) 70.79,105.096 ; R5.1@70.536,106.323 cw(c69.922,105.709) 70.79,105.709 ; R5.1@70.715,106.629 R5.1@70.739,106.605 ; R5.1@70.739,106.756 R5.1@70.739,106.605 ; 70.79,105.456 cw(c71.762,105.456) R5.1@71.074,106.143 ; v1@73.797,82.235 ccw(c73.454,82.578) 73.939,82.578 ; v1@73.939,82.042 73.939,100.635 70.79,103.784 70.79,106.555 R5.1@70.739,106.605 ; 73.939,82.824 ccw(c74.772,82.824) v1@74.183,82.235 ; U1.138@98.667,67.037 99.67,68.04 v1@99.67,69.952 ; v1@99.324,69.911 cw(c98.49,69.077) 99.67,69.077 ; v1@99.504,70.091 cw(c99.103,69.69) 99.67,69.69
  Bottom Layer w0.254: v1@73.797,81.849 cw(c73.331,81.383) 73.99,81.383 cw(c74.649,81.383) v1@74.183,81.849 ; v1(73.99,82.042) 73.99,80.67 75.819,78.842 89.357,78.842 92.71,75.489 94.132,75.489 v1(99.517,70.104) ; v1@99.244,70.104 ccw(c98.585,70.104) 99.051,70.57 ccw(c99.517,71.036) v1@99.517,70.377
BOOT1: LCD.29 R6.1 U1.48 | length 137.5
  Top Layer w0.254: R6.1@69.565,118.469 ccw(c68.698,119.336) 69.925,119.336 ccw(c71.151,119.336) R6.1@70.284,118.469 ; R6.1@69.925,117.983 69.925,126.186 v1(70.206,126.467) ; 69.925,125.129 cw(c71.543,125.129) v1@70.399,126.274 ; 69.925,125.742 cw(c70.93,125.742) v1@70.219,126.453 ; U1.48@112.809,84.715 114.156,86.062 118.904,86.062 127.584,94.742 v1(127.584,130.353) ; LCD.29@120.259,132.197 cw(c119.132,131.07) 120.726,131.07 cw(c122.321,131.07) LCD.29@121.193,132.197 ; LCD.29@120.439,132.377 cw(c119.745,131.683) 120.726,131.683 cw(c121.707,131.683) LCD.29@121.014,132.377 ; v1@120.584,130.495 ccw(c120.241,130.838) 120.726,130.838 ; v1@120.726,130.353 LCD.29@120.726,132.664 ; 120.726,131.084 ccw(c121.559,131.084) v1@120.97,130.495 ; v1@127.391,130.16 cw(c126.925,129.694) 127.584,129.694 cw(c128.243,129.694) v1@127.777,130.16
  Bottom Layer w0.254: v1(70.206,126.467) 70.669,126.93 112.198,126.93 115.5,130.232 v1@120.707,130.232 ; 119.949,130.232 ccw(c119.949,131.13) v1@120.584,130.495 ; 120.286,130.232 cw(c120.286,129.811) v1@120.584,130.109 ; v1@120.828,130.353 v1(127.584,130.353) ; v1@120.97,130.109 cw(c121.559,129.52) 121.559,130.353 ; v1@120.97,130.495 ccw(c121.313,130.838) 121.313,130.353 ; v1@127.391,130.16 ccw(c126.925,129.694) 126.925,130.353 ccw(c126.925,131.012) v1@127.391,130.546
  other v1: 120.777,130.302
"CH340 D+": U8.5 USB_232.3 | length 27.8
  Top Layer w0.254: USB_232.3@34.317,108.89 36.195,108.89 36.754,108.331 38.125,108.331 v2@38.405,108.61 ; v2(39.014,121.158) 39.04,121.183 43.104,121.183 45.085,119.202 U8.5@48.225,119.202 U8.5@48.2,119.228
  Bottom Layer w0.254: v2@38.456,108.636 v2(38.506,108.687) 38.506,113.36 37.846,114.021 37.846,119.99 v2(39.014,121.158)
"CH340 D-": U8.6 USB_232.2 | length 24
  Top Layer w0.254: USB_232.2@34.317,109.69 v2@37.16,109.69 ; v2(37.414,112.039) 39.929,112.039 v2(40.056,112.166) ; v1(47.6,112.192) 50.19,114.783 50.19,117.221 49.479,117.932 U8.6@48.225,117.932
  Bottom Layer w0.254: v2(37.16,109.55) 37.16,111.785 v2(37.414,112.039) ; v2@40.081,112.192 v1(47.6,112.192)
"FSMC A0": U1.10 U4.24 | length 82.4
  Top Layer w0.254: v1@79.334,102.931 cw(c78.868,102.465) 79.527,102.465 cw(c80.186,102.465) v1@79.72,102.931 ; v1(79.527,103.124) 79.527,102.083 79.731,101.879 79.731,90.551 80.086,90.195 v1(80.01,90.195) ; 79.731,90.916 ccw(c80.73,90.916) v1@80.023,90.209 ; 79.731,91.529 ccw(c81.344,91.529) v1@80.203,90.388 ; v1@82.636,111.902 ccw(c82.048,112.491) 82.88,112.491 ; v1(82.829,111.709) 82.829,111.862 82.88,111.912 82.88,116.357 84.071,117.549 U4.24@88.441,117.549 ; 82.88,112.246 ccw(c83.366,112.246) v1@83.022,111.902 ; v1@98.273,77.331 U1.10@107.506,68.098 ; v1@98.292,77.597 ccw(c98.98,77.597) 98.493,77.11 ; v1@98.546,77.597 ccw(c99.848,77.597) 98.927,76.676
  Bottom Layer w0.254: v1(79.527,103.124) 79.527,103.556 81.026,105.054 81.026,109.906 v1(82.829,111.709) ; v1@79.546,103.124 cw(c80.635,103.124) 79.865,103.894 ; v1@79.8,103.124 cw(c81.502,103.124) 80.299,104.327 ; v1@79.836,89.985 cw(c79.442,89.508) 80.061,89.508 ; 80.061,89.659 cw(c80.546,89.659) v1@80.203,90.002 ; v1@80.061,90.195 80.061,89.51 81.382,88.189 87.96,88.189 98.273,77.876 v1(98.273,77.597) ; v1@82.556,111.709 cw(c81.897,111.709) 82.363,111.243 cw(c82.829,110.777) v1@82.829,111.436 ; 97.609,78.54 cw(c96.666,77.597) v1@98,77.597 ; 98.043,78.106 cw(c97.533,77.597) v1@98.254,77.597
"FSMC A1": U1.11 U4.1 | length 39.6
  Top Layer w0.254: U4.1@100.453,101.591 ccw(c100.567,101.584) U4.1@100.486,101.503 ; U4.1@100.706,101.575 ccw(c101.318,101.538) 100.885,101.104 ; U4.1@100.96,101.56 ccw(c102.069,101.492) 101.283,100.706 ; U4.1@100.966,101.549 U4.1@100.441,101.549 102.032,99.957 102.032,74.279 U1.11@107.859,68.451 ; U4.1@101.213,101.544 ccw(c102.82,101.445) 101.682,100.307
"FSMC A2": U1.12 U4.2 | length 45.6
  Top Layer w0.254: U4.2@100.441,102.349 101.842,102.349 102.565,101.625 102.565,74.473 ; 102.565,74.452 108.213,68.805 102.565,74.452
"FSMC A3": U1.13 U4.3 | length 38.3
  Top Layer w0.254: U4.3@100.441,103.149 102.134,103.149 103.2,102.083 103.2,74.524 U1.13@108.566,69.158
"FSMC A4": U1.14 U4.4 | length 44.1
  Top Layer w0.254: U4.4@100.441,103.949 102.757,103.949 v1@103.099,103.607 ; 101.844,103.949 cw(c101.844,102.555) v1@102.829,103.541 ; 102.458,103.949 cw(c102.458,103.169) v1@103.009,103.72 ; v1@103.795,87.488 cw(c103.329,87.022) 103.988,87.022 cw(c104.647,87.022) v1@104.181,87.488 ; v1(103.988,87.681) 103.988,74.444 U1.14@108.92,69.512
  Bottom Layer w0.254: v1@103.022,103.461 cw(c103.022,102.802) 103.488,103.268 cw(c103.954,103.734) v1@103.295,103.734 ; v1(103.022,103.734) 103.911,102.845 v1@103.911,87.833 ; v1@103.795,87.874 ccw(c103.512,88.156) 103.911,88.156 ; 103.911,88.524 ccw(c104.831,88.524) v1@104.181,87.874
"FSMC A5": U1.15 U4.5 | length 45.7
  Top Layer w0.254: U4.5@100.441,104.749 v1(103.835,104.75) ; 103.174,104.749 ccw(c103.174,105.411) v1@103.642,104.943 ; 103.179,104.749 cw(c103.179,104.093) v1@103.642,104.557 ; v1@104.785,88.707 cw(c104.319,88.241) 104.978,88.241 cw(c105.637,88.241) v1@105.171,88.707 ; v1@104.8,89.078 v1(104.978,88.9) 104.978,74.161 U1.15@109.273,69.865
  Bottom Layer w0.254: v1@103.835,104.477 cw(c103.835,103.818) 104.301,104.284 cw(c104.767,104.75) v1@104.108,104.75 ; v1(103.835,104.75) 104.75,103.835 104.75,89.129 v1(104.978,88.9) ; 104.75,89.498 ccw(c105.576,89.498) v1@104.992,88.913 ; 104.75,90.111 ccw(c106.189,90.111) v1@105.171,89.093
"FSMC A6": U1.50 U4.23 | length 82.9
  Top Layer w0.254: v1@88.174,119.289 cw(c87.708,118.823) 88.367,118.823 cw(c89.026,118.823) v1@88.56,119.289 ; 88.367,118.704 ccw(c88.796,118.704) U4.23@88.492,118.4 ; v1(88.367,119.482) 88.367,118.423 U4.23@88.441,118.349 ; U1.50@112.102,85.422 113.777,87.097 118.212,87.097 123.977,92.862 v1@123.977,119.456 ; v1@123.708,119.263 cw(c123.058,118.613) 123.977,118.613 ; v1(123.901,119.456) v1@124.028,119.583 ; 123.977,118.981 cw(c124.376,118.981) v1@124.094,119.263
  Bottom Layer w0.254: v1@88.367,119.431 88.392,119.456 v1(123.901,119.456) ; v1@88.56,119.289 cw(c88.964,118.884) 88.964,119.456 ; v1@88.56,119.675 ccw(c89.087,120.202) 89.087,119.456 ; v1@123.708,119.263 ccw(c123.242,118.797) 123.242,119.456 ccw(c123.242,120.115) v1@123.708,119.649
"FSMC A7": U1.53 U4.22 | length 66.1
  Top Layer w0.254: U4.22@100.441,118.349 v1(103.871,118.349) ; v1@103.678,118.156 ccw(c103.212,117.69) 103.212,118.349 ccw(c103.212,119.008) v1@103.678,118.542 ; U1.53@111.041,86.482 115.11,90.551 119.431,90.551 123.063,94.183 v1(123.063,118.466) ; v1@122.87,118.273 cw(c122.404,117.807) 123.063,117.807 cw(c123.722,117.807) v1@123.256,118.273
  Bottom Layer w0.254: v1(103.871,118.349) 103.988,118.466 v1(123.063,118.466) ; v1@104.064,118.156 cw(c104.812,117.407) 104.812,118.466 ; v1@122.87,118.273 ccw(c122.404,117.807) 122.404,118.466 ccw(c122.404,119.125) v1@122.87,118.659
"FSMC A8": U1.54 U4.21 | length 63.8
  Top Layer w0.254: U4.21@100.441,117.549 v1(102.746,117.549) v1@102.845,117.45 ; v1@102.553,117.356 ccw(c102.087,116.89) 102.087,117.549 ccw(c102.087,118.208) v1@102.553,117.742 ; U1.54@110.688,86.836 114.987,91.135 118.948,91.135 122.225,94.412 122.225,117.45 v1(122.174,117.5) ; v1@121.981,117.307 cw(c121.392,116.719) 122.225,116.719 ; 122.225,116.964 cw(c122.71,116.964) v1@122.367,117.307
  Bottom Layer w0.254: v1@102.768,117.5 v1(122.174,117.5) ; v1@102.939,117.356 cw(c103.288,117.006) 103.288,117.5 ; v1@102.939,117.742 ccw(c103.521,118.324) 103.521,117.5 ; v1@121.981,117.307 ccw(c121.515,116.841) 121.515,117.5 ccw(c121.515,118.159) v1@121.981,117.693
"FSMC A9": U1.55 U4.20 | length 62.6
  Top Layer w0.254: U4.20@100.441,116.749 102.174,116.749 102.387,116.535 v1(103.657,116.535) ; v1@103.464,116.342 ccw(c102.998,115.876) 102.998,116.535 ccw(c102.998,117.194) v1@103.464,116.728 ; U1.55@110.334,87.189 114.889,91.745 118.542,91.745 121.26,94.463 v1(121.26,116.535) ; v1@121.067,116.342 cw(c120.601,115.876) 121.26,115.876 cw(c121.919,115.876) v1@121.453,116.342
  Bottom Layer w0.254: v1(103.657,116.535) 103.871,116.749 121.046,116.749 v1(121.26,116.535) ; v1@103.671,116.522 cw(c104.218,115.974) 104.218,116.749 ; v1@103.85,116.342 cw(c104.832,115.361) 104.832,116.749 ; 120.085,116.749 cw(c120.085,115.361) v1@121.067,116.342 ; 120.699,116.749 cw(c120.699,115.974) v1@121.246,116.522
"FSMC A10": LCD.2 U1.56 U4.19 | length 112.3
  Top Layer w0.254: v1@80.477,123.713 ccw(c79.889,124.302) 80.721,124.302 ; v1@80.721,123.52 80.721,130.759 LCD.2@85.166,135.204 ; 80.721,124.057 ccw(c81.207,124.057) v1@80.863,123.713 ; LCD.2@84.506,135.204 cw(c82.911,135.204) 84.039,134.077 cw(c85.166,132.949) LCD.2@85.166,134.544 ; LCD.2@84.76,135.204 cw(c83.779,135.204) 84.472,134.51 cw(c85.166,133.817) LCD.2@85.166,134.798 ; v1@98.41,121.092 cw(c97.944,120.626) 98.603,120.626 cw(c99.262,120.626) v1@98.796,121.092 ; v1(98.603,121.285) 98.603,116.307 98.961,115.949 U4.19@100.441,115.949 ; U1.56@109.981,87.543 114.817,92.38 118.034,92.38 120.04,94.386 v1(120.04,121.26) ; v1@119.847,121.067 cw(c119.381,120.601) 120.04,120.601 cw(c120.699,120.601) v1@120.233,121.067
  Bottom Layer w0.254: v1@80.477,123.327 cw(c80.011,122.861) 80.67,122.861 cw(c81.329,122.861) v1@80.863,123.327 ; v1(80.67,123.52) 80.67,122.834 82.245,121.26 v1(120.04,121.26) ; 97.882,121.26 ccw(c97.882,122.005) v1@98.41,121.478 ; 98.005,121.26 cw(c98.005,120.687) v1@98.41,121.092 ; v1@98.796,121.092 cw(c99.201,120.687) 99.201,121.26 ; v1@98.796,121.478 ccw(c99.323,122.005) 99.323,121.26 ; v1@119.847,121.067 ccw(c119.381,120.601) 119.381,121.26 ccw(c119.381,121.919) v1@119.847,121.453
"FSMC A11": U1.57 U4.18 | length 50.6
  Top Layer w0.254: U4.18@101.039,115.149 ccw(c101.039,116.639) v1@102.093,115.585 ; U1.57@109.627,87.897 114.567,92.837 117.145,92.837 118.948,94.64 118.948,115.291 v1(118.847,115.392)
  Bottom Layer w0.254: v1(102.286,115.392) v1(118.847,115.392)
"FSMC A12": U1.87 U4.28 | length 36.1
  Top Layer w0.254: v1@86.37,111.547 ccw(c85.904,112.013) 86.563,112.013 ccw(c87.222,112.013) v1@86.756,111.547 ; v1(86.563,111.354) 86.563,113.741 87.171,114.349 U4.28@88.441,114.349 ; v1@91.846,91.262 92.826,91.262 U1.87@95.838,88.25 ; v1@92.014,91.12 cw(c92.357,90.777) 92.357,91.262 ; v1@92.014,91.506 ccw(c92.603,92.095) 92.603,91.262
  Bottom Layer w0.254: v1@86.563,111.081 cw(c86.563,110.422) 87.029,110.888 cw(c87.495,111.354) v1@86.836,111.354 ; v1(86.563,111.354) 89.383,108.534 89.383,93.751 v1(91.821,91.313) ; v1@91.548,91.313 ccw(c90.889,91.313) 91.355,91.779 ccw(c91.821,92.245) v1@91.821,91.586
"FSMC A13": U1.88 U4.27 | length 40.6
  Top Layer w0.254: v1@85.524,112.597 ccw(c85.338,112.878) 85.674,112.878 ; 85.579,112.973 cw(c85.23,112.624) v1@85.658,112.379 ; v1(85.674,112.37) 85.674,112.878 ; v1@85.825,112.597 cw(c86.01,112.878) 85.674,112.878 ; U4.27@88.441,115.149 86.142,115.149 85.598,114.605 85.598,112.954 85.674,112.878 ; v1@88.468,91.821 88.468,91.567 90.018,90.018 93.364,90.018 U1.88@95.485,87.897 ; v1@88.513,91.745 ccw(c89.049,91.745) 88.67,91.365 ; v1@88.767,91.745 ccw(c89.916,91.745) 89.103,90.932
  Bottom Layer w0.254: v1@85.481,112.177 cw(c85.015,111.711) 85.674,111.711 cw(c86.333,111.711) v1@85.867,112.177 ; v1(85.674,112.37) 85.674,109.906 88.494,107.086 v1(88.494,91.745) ; v1@88.301,91.938 ccw(c87.835,92.404) 88.494,92.404 ccw(c89.153,92.404) v1@88.687,91.938
"FSMC A14": U1.89 U4.26 | length 51.4
  Top Layer w0.254: v1@81.646,94.275 ccw(c80.996,94.925) 81.915,94.925 ; v1(81.839,94.082) 81.915,94.158 81.915,103.073 v1(82.22,103.378) ; 81.915,94.557 ccw(c82.314,94.557) v1@82.032,94.275 ; 81.915,101.983 cw(c83.615,101.983) v1@82.413,103.185 ; 81.915,102.596 cw(c83.002,102.596) v1@82.233,103.365 ; v1@84.516,111.445 ccw(c84.05,111.911) 84.709,111.911 ccw(c85.368,111.911) v1@84.902,111.445 ; v1(84.709,111.252) 84.709,115.443 85.215,115.949 U4.26@88.441,115.949 ; v1@85.674,92.615 cw(c85.674,91.71) 86.314,92.35 ; v1@85.801,92.862 89.23,89.433 93.241,89.433 U1.89@95.131,87.543 ; v1@85.947,92.888 ccw(c86.361,92.888) 86.068,92.595
  Bottom Layer w0.254: v1@81.839,93.809 cw(c81.839,93.15) 82.305,93.616 cw(c82.771,94.082) v1@82.112,94.082 ; v1(81.839,94.082) 83.033,92.888 v1(85.674,92.888) ; v1(82.22,103.378) 82.677,103.835 82.677,108.814 84.709,110.846 ; 83.956,110.092 ccw(c82.796,111.252) v1@84.436,111.252 ; 84.389,110.526 ccw(c83.663,111.252) v1@84.69,111.252 ; v1@85.481,92.695 ccw(c85.015,92.229) 85.015,92.888 ccw(c85.015,93.547) v1@85.481,93.081
"FSMC A15": U1.90 U4.25 | length 54.5
  Top Layer w0.254: 80.67,100.937 cw(c82.197,100.937) v1@81.117,102.017 ; 80.67,101.551 cw(c81.583,101.551) v1@80.938,102.196 ; v1(80.924,102.21) 80.67,101.956 80.67,93.548 v1(81.686,92.532) ; v1@81.413,92.532 ccw(c80.754,92.532) 81.22,92.998 ccw(c81.686,93.464) v1@81.686,92.805 ; v1@83.551,112.994 ccw(c83.085,113.46) 83.744,113.46 ccw(c84.403,113.46) v1@83.937,112.994 ; v1(83.744,112.801) 83.744,115.875 84.618,116.749 U4.25@88.441,116.749 ; v1@85.827,91.243 cw(c85.827,90.584) 86.293,91.05 cw(c86.759,91.516) v1@86.1,91.516 ; v1(85.827,91.516) 88.443,88.9 93.067,88.9 U1.90@94.778,87.189
  Bottom Layer w0.254: v1@80.731,102.403 ccw(c80.265,102.869) 80.924,102.869 ccw(c81.583,102.869) v1@81.117,102.403 ; v1(80.924,102.21) 80.924,103.937 81.839,104.851 81.839,109.195 83.744,111.1 v1(83.744,112.801) ; v1@81.686,92.259 cw(c81.686,91.416) 82.283,92.012 ; v1@81.724,92.57 82.779,91.516 v1(85.827,91.516) ; v1@81.959,92.532 ccw(c82.435,92.532) 82.099,92.196 ; v1@83.551,112.608 cw(c83.085,112.142) 83.744,112.142 cw(c84.403,112.142) v1@83.937,112.608 ; v1@85.634,91.323 ccw(c85.168,90.857) 85.168,91.516 ccw(c85.168,92.175) v1@85.634,91.709
"FSMC A16": U1.80 U4.42 | length 17.5
  Top Layer w0.254: U4.42@88.441,103.149 90.145,103.149 90.754,102.54 90.754,98.284 U1.80@98.313,90.725
"FSMC A17": U1.81 U4.43 | length 16.7
  Top Layer w0.254: U4.43@88.441,102.349 89.777,102.349 90.119,102.006 90.119,98.212 U1.81@97.96,90.371
"FSMC A18": U1.82 U4.44 | length 15.3
  Top Layer w0.254: U4.44@88.441,101.549 89.281,100.708 89.281,98.343 U1.82@97.606,90.018
"FSMC D0": LCD.6 U1.85 U4.7 | length 78.2
  Top Layer w0.254: LCD.6@90.246,134.544 cw(c90.246,132.949) 91.374,134.077 cw(c92.501,135.204) LCD.6@90.907,135.204 ; LCD.6@90.246,134.798 cw(c90.246,133.817) 90.94,134.51 cw(c91.634,135.204) LCD.6@90.653,135.204 ; LCD.6@90.246,135.204 91.542,133.909 91.542,131.902 92.202,131.242 92.812,131.242 93.447,130.607 93.447,110.439 91.516,108.509 v1(91.796,108.509) ; v1@91.815,108.509 cw(c92.535,108.509) 92.026,109.018 ; v1@92.069,108.509 cw(c93.402,108.509) 92.459,109.452 ; U1.85@96.546,88.957 98.178,87.325 99.314,87.325 100.609,88.621 v1(100.609,89.687) ; v1@97.522,106.156 cw(c96.875,105.508) 97.79,105.508 ; 97.79,105.871 cw(c98.193,105.871) 97.908,106.156 cw(c98.374,105.69) 98.374,106.349 cw(c98.374,107.008) v1@97.908,106.542 ; v1@99.578,98.085 ccw(c99.112,98.551) 99.771,98.551 ccw(c100.43,98.551) v1@99.964,98.085 ; v1@99.797,97.866 v1(99.771,97.892) 99.771,99.39 97.79,101.371 97.79,106.274 v1(97.715,106.349) U4.7@100.441,106.349 ; v1@100.416,89.494 cw(c99.95,89.028) 100.609,89.028 cw(c101.268,89.028) v1@100.802,89.494
  Bottom Layer w0.254: v1(91.796,108.509) 91.516,108.509 92.564,107.461 92.564,107.444 93.66,106.349 v1(97.715,106.349) ; v1@91.815,108.508 ccw(c92.481,108.487) 92.01,108.015 ; v1@92.068,108.5 ccw(c93.285,108.461) 92.424,107.601 ; v1@97.522,106.156 ccw(c97.056,105.69) 97.056,106.349 ccw(c97.056,107.008) v1@97.522,106.542 ; v1@99.746,97.866 100.508,97.104 100.508,89.789 v1(100.609,89.687) ; v1@99.771,97.619 cw(c99.771,97.082) 100.151,97.461 ; v1@100.044,97.892 ccw(c100.826,97.892) 100.273,97.339 ; v1@100.416,89.88 ccw(c100.196,90.101) 100.508,90.101 ; 100.508,90.592 ccw(c101.514,90.592) v1@100.802,89.88
"FSMC D1": LCD.7 U1.86 U4.8 | length 65.3
  Top Layer w0.254: v1@91.705,92.818 cw(c91.705,92.159) 92.171,92.625 cw(c92.637,93.091) v1@91.978,93.091 ; v1(91.705,93.091) U1.86@96.192,88.604 ; LCD.7@92.786,132.004 cw(c92.786,131.452) 93.176,131.842 ; LCD.7@92.786,132.664 92.786,132.232 94.234,130.785 94.234,108.571 95.656,107.149 ; LCD.7@92.938,132.65 ccw(c94.038,132.544) 93.256,131.762 ; LCD.7@93.191,132.625 ccw(c94.733,132.477) 93.637,131.381 ; LCD.7@93.444,132.601 ccw(c95.427,132.41) 94.018,131.001 ; v1@96.505,100.599 ccw(c95.977,101.127) 96.723,101.127 ; v1@96.723,100.406 96.723,105.334 95.656,106.401 95.656,107.149 ; 96.723,101.004 ccw(c97.296,101.004) v1@96.891,100.599 ; U4.8@100.441,107.149 95.656,107.149
  Bottom Layer w0.254: v1@91.512,93.284 ccw(c91.046,93.75) 91.705,93.75 ccw(c92.364,93.75) v1@91.898,93.284 ; v1(91.705,93.091) 91.705,99.147 92.964,100.406 v1(96.698,100.406) ; v1@96.505,100.213 ccw(c96.039,99.747) 96.039,100.406 ccw(c96.039,101.065) v1@96.505,100.599
"FSMC D2": LCD.8 U1.114 U4.9 | length 80
  Top Layer w0.254: U1.114@90.182,75.522 99.39,84.731 v1@99.39,86.157 ; LCD.8@92.786,134.544 cw(c92.786,132.949) 93.914,134.077 cw(c95.041,135.204) LCD.8@93.447,135.204 ; LCD.8@92.786,134.798 cw(c92.786,133.817) 93.48,134.51 cw(c94.174,135.204) LCD.8@93.193,135.204 ; LCD.8@92.786,135.204 94.107,133.883 94.107,131.851 95.047,130.912 95.047,109.777 96.876,107.949 U4.9@100.441,107.949 ; 97.828,107.949 ccw(c97.828,108.699) v1@98.359,108.168 ; 97.958,107.949 cw(c97.958,107.381) v1@98.359,107.782 ; v1@98.745,107.782 cw(c99.146,107.381) 99.146,107.949 ; v1@98.745,108.168 ccw(c99.276,108.699) 99.276,107.949 ; v1@99.136,86.157 v1@99.39,86.157 ; v1@99.223,85.964 cw(c98.818,85.559) 99.39,85.559 ; 99.39,85.436 cw(c100.136,85.436) v1@99.609,85.964 ; v1(99.416,86.157) v1@99.39,86.157
  Bottom Layer w0.254: v1@98.552,107.702 cw(c98.552,107.043) 99.018,107.509 cw(c99.484,107.975) v1@98.825,107.975 ; v1(98.552,107.975) 99.416,107.112 99.416,100.101 98.577,99.263 98.577,96.749 99.593,95.733 99.593,90.424 99.517,90.348 99.517,89.205 99.847,88.875 99.847,87.782 99.416,87.351 v1(99.416,86.157) v1@99.593,86.335 ; v1@99.223,86.35 ccw(c98.757,86.816) 99.416,86.816 ccw(c100.075,86.816) v1@99.609,86.35
"FSMC D3": LCD.9 U1.115 U4.10 | length 85.1
  Top Layer w0.254: U1.115@90.535,75.169 92.151,76.784 v1(93.015,76.784) ; v1(92.253,79.07) 96.291,83.109 96.291,83.515 v1(96.063,83.744) ; v1@92.253,79.343 ccw(c92.253,80.002) 92.719,79.536 ccw(c93.185,79.07) v1@92.526,79.07 ; v1@92.822,76.591 ccw(c92.356,76.125) 92.356,76.784 ccw(c92.356,77.443) v1@92.822,76.977 ; v1@92.898,108.595 cw(c92.371,108.068) 93.116,108.068 ; v1(93.091,108.788) 93.116,108.763 93.116,100.762 93.726,100.152 v1(93.726,99.162) ; 93.116,108.19 cw(c93.689,108.19) v1@93.284,108.595 ; v1@93.533,99.355 ccw(c93.067,99.821) 93.726,99.821 ccw(c94.385,99.821) v1@93.919,99.355 ; LCD.9@95.326,132.664 96.012,131.978 96.012,127 95.834,126.822 95.834,123.393 96.012,123.215 96.012,110.49 95.783,110.261 97.296,108.749 U4.10@100.441,108.749 ; v1@95.844,110.429 ccw(c95.44,110.834) 96.012,110.834 ; v1@95.984,83.482 cw(c95.86,83.069) 96.291,83.069 ; 96.012,110.956 ccw(c96.758,110.956) v1@96.23,110.429 ; v1@96.056,110.236 ccw(c96.654,110.236) 96.231,109.813 ; v1@96.057,83.726 cw(c95.962,83.411) 96.291,83.411 ; v1@96.31,110.236 ccw(c97.521,110.236) 96.665,109.38
  Bottom Layer w0.254: v1@92.253,78.797 cw(c92.253,78.138) 92.719,78.604 cw(c93.185,79.07) v1@92.526,79.07 ; v1(92.253,79.07) 93.142,78.181 v1@93.142,76.784 ; v1@92.822,76.977 ccw(c92.049,77.75) 93.142,77.75 ; v1(93.091,108.788) 94.539,110.236 v1(96.037,110.236) ; v1@93.091,109.061 ccw(c93.091,109.72) 93.557,109.254 ccw(c94.023,108.788) v1@93.364,108.788 ; v1@93.544,98.958 cw(c93.182,98.552) 93.726,98.552 ; v1(93.726,99.162) 93.726,98.552 ; v1@93.908,98.958 ccw(c94.27,98.552) 93.726,98.552 ; v1@95.844,110.043 ccw(c95.378,109.577) 95.378,110.236 ccw(c95.378,110.895) v1@95.844,110.429 ; v1(96.063,83.744) 97.688,85.369 97.688,94.59 93.726,98.552 ; v1@96.063,84.017 ccw(c96.063,84.676) 96.529,84.21 ccw(c96.995,83.744) v1@96.336,83.744